# EAGLE board TTGO_shield_revC (EAGLE 9.0.1)
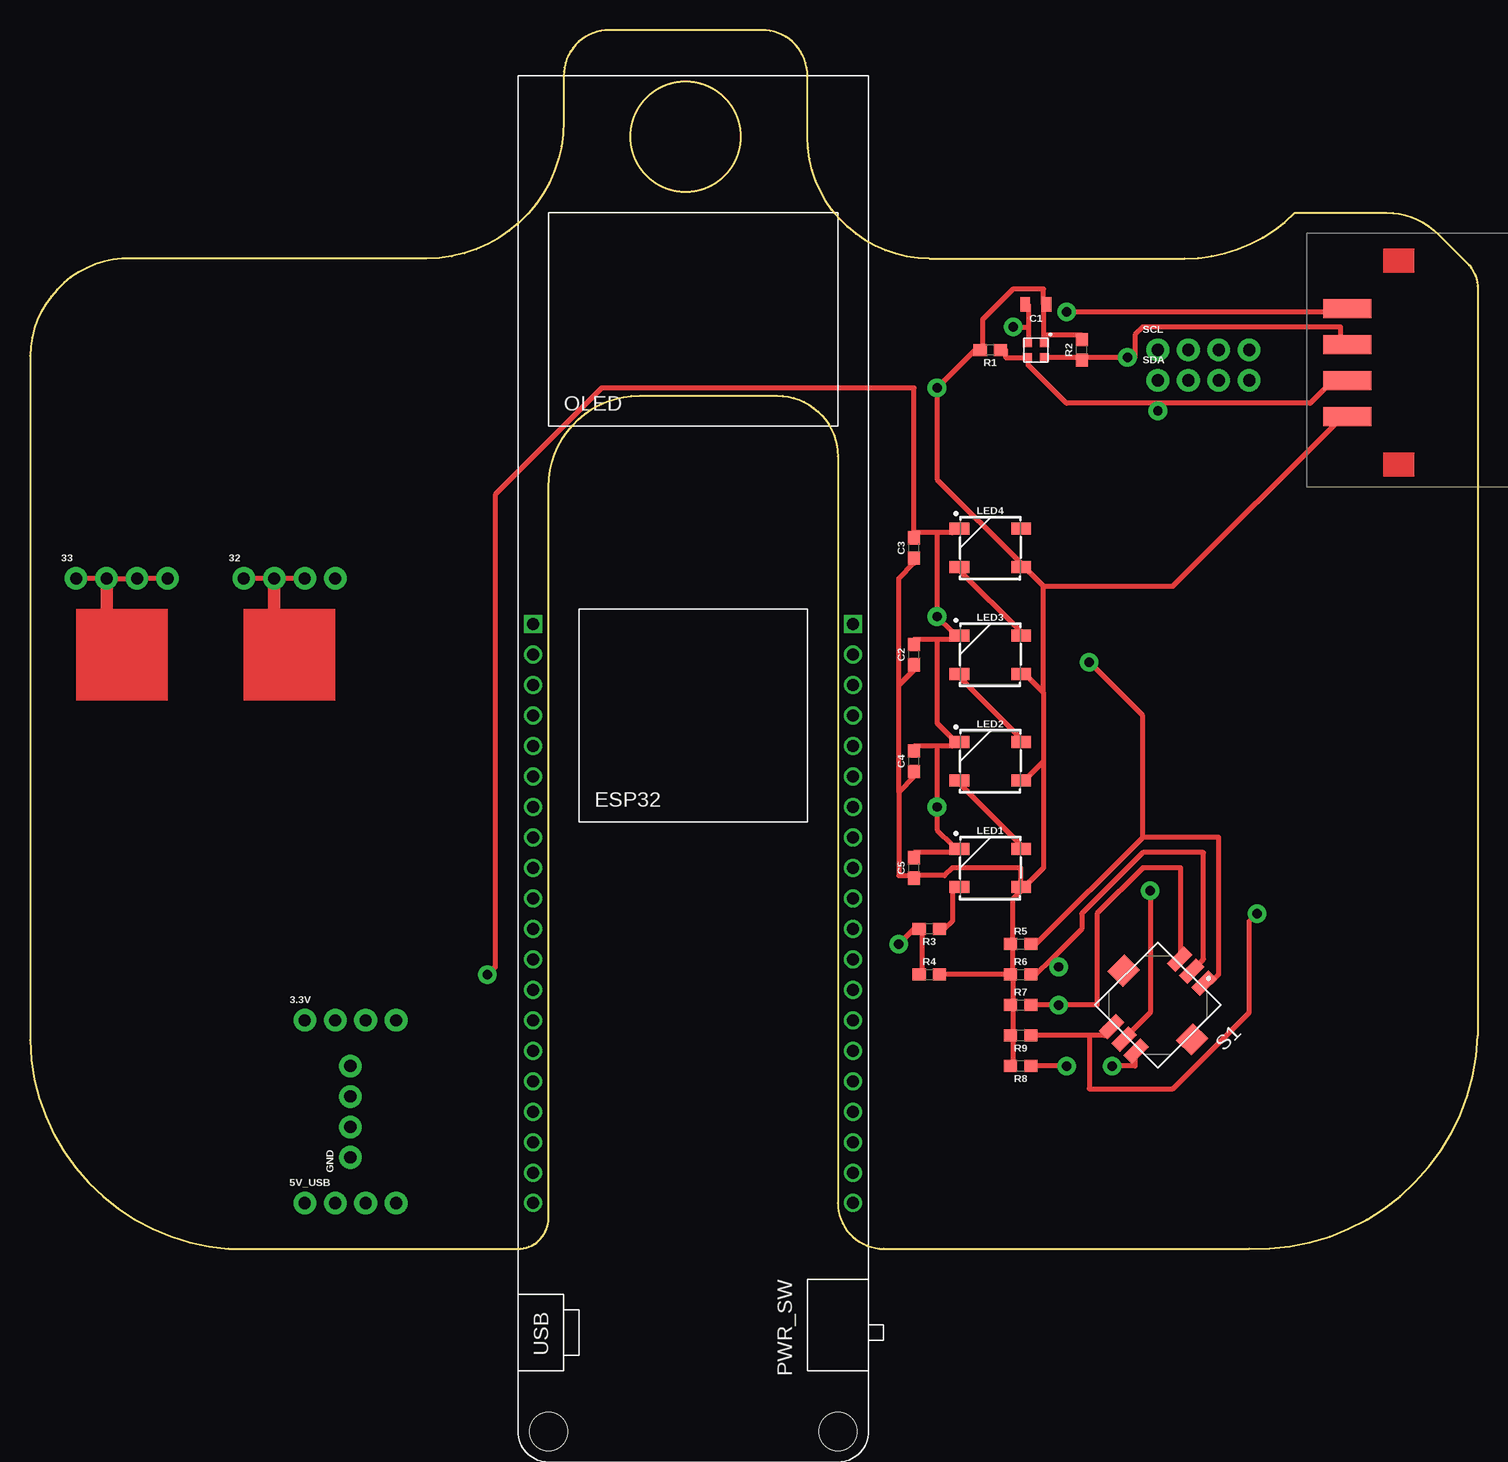
[diagram p0: board, top side]
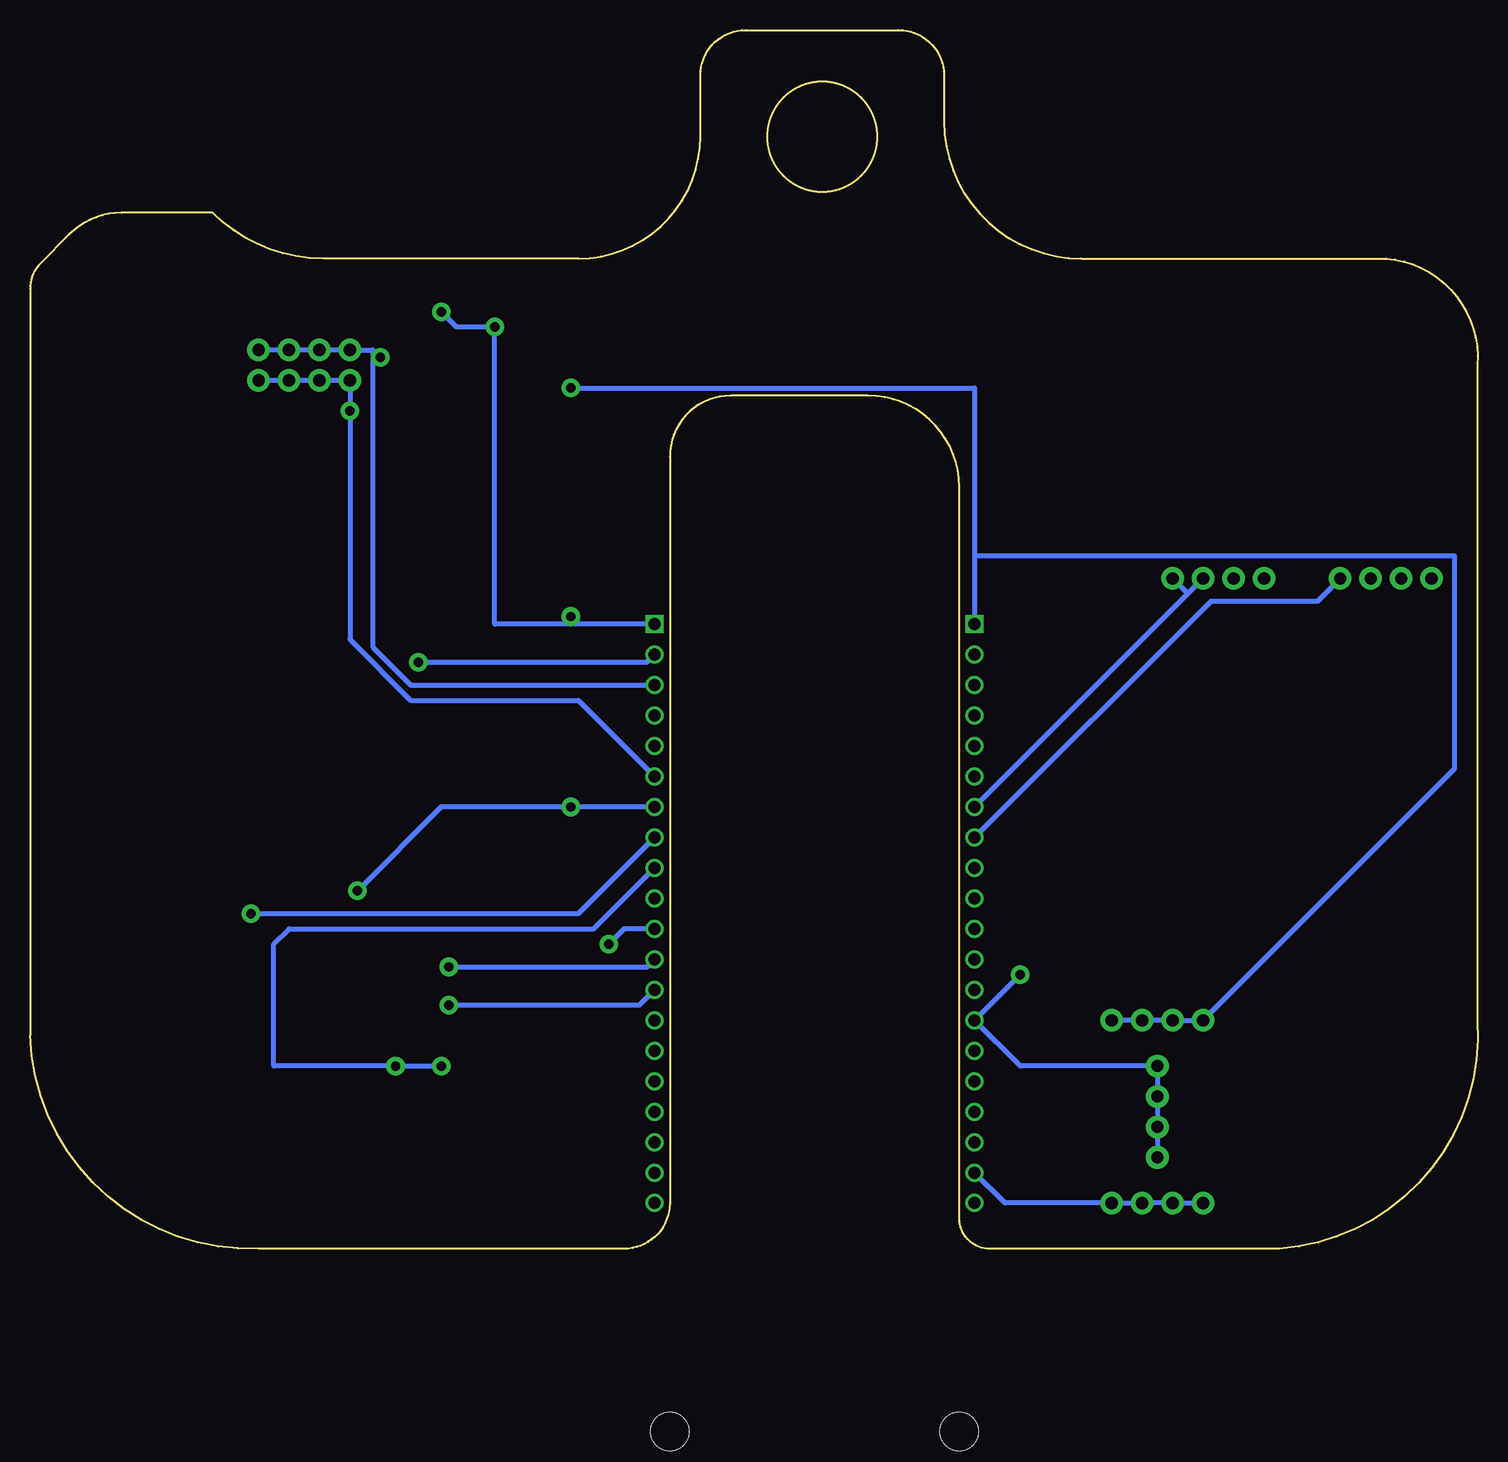
[diagram p1: board, bottom side, seen from below]

Size 120.69 x 101.6 mm. Coordinates in mm from the lower left corner, seen from the top.
Outline: 43.22,2.54 43.22,63.5 arc-90 50.84,71.12 62.27,71.12 arc-90 67.35,66.04 67.35,3.81 arc90 71.16,0 101.64,0 arc90 120.69,17.78 120.69,80.01 arc45 119.79,82.18 117.41,84.56 arc45 113.07,86.36 105.45,86.36 arc-45 96.25,82.55 74.97,82.55 arc-90 64.81,92.71 64.81,97.79 arc90 61,101.6 48.3,101.6 arc90 44.49,97.79 44.49,93.98 arc-90 33.06,82.55 7.66,82.55 arc90 0.04,73.66 0.04,19.05 arc90 16.55,0 40.68,0 arc90 43.22,2.54
Outline: circle at 54.65,92.71 radius 4.58
Copper layers (1*16): Top 0.035mm / dielectric 1.5mm / Bottom 0.035mm
Design rules "OthermillDRC_1_64_v2": minimum track width 16mil, minimum drill 31mil, track to track 0.39878125mm, track to pad 0.39878125mm, pad to pad 0.39878125mm, via to via 0.39878125mm, smd to smd 0mil, copper to edge 0mil, drill to drill 1mil, minimum pad ring 0mil, minimum via ring 15mil, stop-mask expansion 1mil, vias tented up to drill 30mil, thermal gap 10mil
tRestrict: area 39.4,1.3 to 44.5,54.6; area 66.1,1.3 to 71.2,54.6; area 21.6,17.8 to 31.8,20.3; area 25.4,6.4 to 28,16.5; area 21.6,2.5 to 31.8,5.1; area 92.8,71.1 to 102.9,76.2
vRestrict: area 77.5,55.9 to 82.6,61; area 82.6,73.7 to 85.1,76.2; area 77.5,47 to 82.6,52.1; area 77.5,38.1 to 82.6,43.2; area 77.5,29.2 to 82.6,34.3; area 90.2,16.5 to 97.8,24.1; area 106.7,63.5 to 120.7,85.1

## Footprints (pad centres in the part's own frame; a part is rotated, then mirrored left to right if it is on the bottom)
1X04_NO_SILK = drill 1.016 pad 1.88: 1 0,0; 2 2.54,0; 3 5.08,0; 4 7.62,0
0805 = smd 0.8 x 1.2: 1 -0.9,0; 2 0.9,0
0603 = smd 1.1 x 1: 1 -0.85,0; 2 0.85,0
10120045-400LF = smd 1.6 x 4: A 0.8,2; B 3.8,2; C 6.8,2; D 9.8,2
WS2812B = smd 1.651 x 1: 1 2.577,-1.6; 2 2.577,1.6; 3 -2.577,1.6; 4 -2.577,-1.6
CHIPLED-4 = smd 0.7 x 0.75: 1 -0.6,0.7; 2 -0.6,-0.7; 3 0.6,-0.7; 4 0.6,0.7
TTGO-ESP32-OLED-18650 = drill 1: 0 26.67,16.51; 2 26.67,13.97; 4 26.67,19.05; 5 26.67,26.67; 5V 0,3.81; 12 0,19.05; 13 0,13.97; 14 0,21.59; 15 26.67,11.43; 16 26.67,21.59; 17 26.67,24.13; 18 26.67,29.21; 19 26.67,31.75; 21 26.67,36.83; 22 26.67,44.45; 23 26.67,46.99; 25 0,29.21; 26 0,26.67; 27 0,24.13; 32 0,34.29; 33 0,31.75; 34 0,39.37; 35 0,36.83; CLK 26.67,3.81; CMD 0,6.35; EN 0,46.99; GND 0,16.51; GND@GND_2 26.67,34.29; NC 0,1.27; NC@NC_2 26.67,1.27; RX 26.67,39.37; SD0 26.67,6.35; SD1 26.67,8.89; SD2 0,11.43; SD3 0,8.89; SVN 0,41.91; SVP 0,44.45; TX 26.67,41.91 | drill 1 square: 3.3V 0,49.53; GND@GND_3 26.67,49.53 | hole 3.175: 1.27,-17.78; 25.4,-17.78
JS1400BFQ = smd 2 x 1: 1 -4,1.43; 2 -4,0; 3 -4,-1.43; 4 4,1.43; 5 4,0; 6 4,-1.43 | smd 2 x 1.8: P$1 0,4.05; P$2 0,-4.05

## Placement (x,y rotation side)
3.3V  [1X04_NO_SILK]  22.9,19.05 0 top
5V_USB  [1X04_NO_SILK]  22.9,3.81 0 top
32  [1X04_NO_SILK]  17.82,55.88 0 top
33  [1X04_NO_SILK]  3.85,55.88 0 top
C1  1.0uF  [0805]  83.86,78.74 180 top
C2  0.1uF  [0603]  73.7,49.53 90 top
C3  0.1uF  [0603]  73.7,58.42 90 top
C4  0.1uF  [0603]  73.7,40.64 90 top
C5  0.1uF  [0603]  73.7,31.75 90 top
GND  [1X04_NO_SILK]  26.71,7.62 90 top
HEMA1  10120045-400LF  [10120045-400LF]  111.8,68.58 90 top
LED1  WS2812B  [WS2812B]  80.05,31.75 0 top
LED2  WS2812B  [WS2812B]  80.05,40.64 0 top
LED3  WS2812B  [WS2812B]  80.05,49.53 0 top
LED4  WS2812B  [WS2812B]  80.05,58.42 0 top
LTSNS1  LTR-329ALS-01  [CHIPLED-4]  83.86,74.93 270 top
MAIN  TTGO-ESP32-OLED-18650  [TTGO-ESP32-OLED-18650]  41.95,2.54 0 top
R1  4.7k  [0603]  80.05,74.93 180 top
R2  4.7k  [0603]  87.67,74.93 90 top
R3  470  [0603]  74.97,26.67 180 top
R4  10k  [0603]  74.97,22.86 0 top
R5  10k  [0603]  82.59,25.4 0 top
R6  10k  [0603]  82.59,22.86 0 top
R7  10k  [0603]  82.59,20.32 0 top
R8  10k  [0603]  82.59,15.24 180 top
R9  10k  [0603]  82.59,17.78 180 top
S1  JS1400BFQ  [JS1400BFQ]  94.02,20.32 225 top
SCL  [1X04_NO_SILK]  94.02,74.93 0 top
SDA  [1X04_NO_SILK]  94.02,72.39 0 top

## Library data of the parts
3.3V 5V_USB 32 33 GND SCL SDA = SparkFun-Connectors; PROD_ID: CONN-09696
C1 = SparkFun-Capacitors; PROD_ID: CAP-08064
C2-C5 = SparkFun-Capacitors; PROD_ID: CAP-08604
HEMA1 MAIN S1 = BadgeParts
LED1-LED4 = SparkFun-LED; PROD_ID: DIO-12503
LTSNS1 = NickParts
R1 R2 = SparkFun-Resistors; PROD_ID: RES-07857
R3 = SparkFun-Resistors; PROD_ID: RES-07869
R4-R9 = SparkFun-Resistors; PROD_ID: RES-00824

## Nets
5V: 5V_USB.1 5V_USB.2 5V_USB.3 5V_USB.4 MAIN.5V
B1: MAIN.23 R5.2 S1.1
B2: MAIN.16 R6.2 S1.2
B3: MAIN.4 R7.2 S1.3
B4: MAIN.18 R8.1 S1.4
B5: MAIN.19 R9.1 S1.6
CAP1: 32.1 32.2 32.3 32.4 MAIN.32
CAP2: 33.1 33.2 33.3 33.4 MAIN.33
GND: C1.2 C2.2 C3.2 C4.2 C5.2 GND.1 GND.2 GND.3 GND.4 HEMA1.D LED1.3 LED2.3 LED3.3 LED4.3 LTSNS1.2 MAIN.GND MAIN.GND@GND_2 MAIN.GND@GND_3 S1.5
N$9: LED1.2 LED2.4
N$10: LED2.2 LED3.4
N$11: LED3.2 LED4.4
N$12: LED1.4 R3.1
RGBLEDS: MAIN.17 R3.2 R4.1
SCL: HEMA1.C LTSNS1.4 MAIN.22 R2.1 SCL.1 SCL.2 SCL.3 SCL.4
SDA: HEMA1.B LTSNS1.3 MAIN.21 R1.1 SDA.1 SDA.2 SDA.3 SDA.4
VDD: 3.3V.1 3.3V.2 3.3V.3 3.3V.4 C1.1 C2.1 C3.1 C4.1 C5.1 HEMA1.A LED1.1 LED2.1 LED3.1 LED4.1 LTSNS1.1 MAIN.3.3V R1.2 R2.2 R4.2 R5.1 R6.1 R7.1 R8.2 R9.2

## Tracks (layer width: path | path; a pad name or v marks a point on that pad's centre or on a via)
5V
  Bottom 0.406: 5V_USB.1 5V_USB.2 5V_USB.3 5V_USB.4 39.41,3.81 MAIN.5V
B1  (via drill 0.79)
  Top 0.406: 92.75,34.29 83.86,25.4 R5.2 | 92.75,34.29 99.1,34.29 99.1,22.86 98.47,22.22 S1.1 | v88.31,48.89 92.75,44.45 92.75,34.29
  Bottom 0.406: MAIN.23 69.26,48.89 v88.31,48.89
B2  (via drill 0.79)
  Top 0.406: 85.13,24.13 87.67,26.67 87.67,27.94 92.75,33.02 97.83,33.02 97.83,24.13 S1.2 | 85.13,24.13 83.86,22.86 R6.2 | 85.13,24.13 v85.77,23.5
  Bottom 0.406: MAIN.16 69.26,23.5 v85.77,23.5
B3  (via drill 0.79)
  Top 0.406: R7.2 v85.77,20.32 88.94,20.32 88.94,27.94 92.75,31.75 95.93,31.75 95.93,24.76 S1.3
  Bottom 0.406: MAIN.4 69.89,20.32 v85.77,20.32
B4  (via drill 0.79)
  Top 0.406: v86.4,15.24 R8.1 | v90.21,15.24 92.12,15.24 92.12,15.88 S1.4
  Bottom 0.406: v86.4,15.24 v90.21,15.24 100.37,15.24 100.37,25.4 99.1,26.67 73.7,26.67 MAIN.18
B5  (via drill 0.79)
  Top 0.406: 88.31,17.78 89.58,17.78 89.58,18.42 S1.6 | 88.31,17.78 R9.1 | v102.28,27.94 101.64,27.31 101.64,19.68 95.29,13.33 88.31,13.33 88.31,17.78
  Bottom 0.406: MAIN.19 74.97,27.94 v102.28,27.94
CAP1
  Top 0.406: 32.1 32.2 32.3
  Bottom 0.406: 32.3 24.17,54.61 | 24.17,54.61 MAIN.32 | 24.17,54.61 32.4
CAP2
  Top 0.406: 33.1 33.2 33.3 33.4
  Bottom 0.406: MAIN.33 22.27,53.97 13.38,53.97 33.4
GND  (via drill 0.79)
  Top 0.406: 83.23,76.83 83.23,78.74 C1.2 | 83.23,76.83 83.23,75.56 LTSNS1.2 | v81.96,76.83 83.23,76.83 | v86.4,78.1 109.26,78.1 HEMA1.D | C5.2 73.7,33.02 76.88,33.02 LED1.3 76.88,33.66 75.61,34.92 v75.61,36.83 75.61,41.91 | 75.61,41.91 76.88,41.91 LED2.3 76.88,42.55 75.61,43.81 75.61,50.8 | 75.61,41.91 73.7,41.91 C4.2 | 75.61,50.8 76.88,50.8 LED3.3 76.88,51.44 v75.61,52.7 75.61,59.69 | 75.61,50.8 73.7,50.8 C2.2 | 75.61,59.69 76.88,59.69 LED4.3 | 75.61,59.69 73.7,59.69 | S1.5 93.39,19.68 v93.39,29.85 | v38.14,22.86 38.78,23.5 38.78,62.86 47.67,71.75 73.7,71.75 73.7,59.69 | 73.7,59.69 C3.2
  Bottom 0.406: MAIN.GND@GND_3 75.61,52.07 | 75.61,52.07 81.96,52.07 v81.96,76.83 85.13,76.83 v86.4,78.1 | GND.1 GND.2 GND.3 GND.4 38.14,15.24 MAIN.GND v38.14,22.86 | v93.39,29.85 86.4,36.83 v75.61,36.83 MAIN.GND@GND_2 | v75.61,52.7 75.61,52.07
N$9
  Top 0.406: LED2.4 77.51,38.73 82.59,33.66 LED1.2
N$10
  Top 0.406: LED3.4 77.51,47.62 82.59,42.55 LED2.2
N$11
  Top 0.406: LED4.4 77.51,56.52 82.59,51.44 LED3.2
N$12
  Top 0.406: R3.1 76.24,26.67 76.88,27.31 76.88,29.85 LED1.4
RGBLEDS  (via drill 0.79)
  Top 0.406: R4.1 74.34,22.86 74.34,26.67 R3.2 73.7,26.67 v72.43,25.4
  Bottom 0.406: v72.43,25.4 71.16,26.67 MAIN.17
SCL  (via drill 0.79)
  Top 0.406: 87.67,74.3 84.5,74.3 LTSNS1.4 | 87.67,74.3 v91.48,74.3 92.12,74.3 92.12,76.2 92.75,76.83 109.26,76.83 109.26,75.56 HEMA1.C | 87.67,74.3 R2.1
  Bottom 0.406: MAIN.22 88.94,46.99 92.12,50.16 92.12,74.3 | 92.12,74.3 92.12,74.93 SCL.1 SCL.2 SCL.3 SCL.4 | 92.12,74.3 v91.48,74.3
SDA  (via drill 0.79)
  Top 0.406: 83.23,74.3 81.32,74.3 81.32,74.93 R1.1 | 83.23,74.3 83.23,73.66 86.4,70.48 94.02,70.48 | 94.02,70.48 106.72,70.48 107.99,71.75 109.26,71.75 HEMA1.B | 83.23,74.3 LTSNS1.3 | v94.02,69.85 94.02,70.48
  Bottom 0.406: MAIN.21 74.97,45.72 88.94,45.72 94.02,50.8 v94.02,69.85 SDA.1 SDA.2 SDA.3 SDA.4
VDD  (via drill 0.79)
  Top 0.406: 73.7,31.11 72.43,31.11 72.43,38.1 | 72.43,38.1 73.7,39.37 C4.1 | 72.43,46.99 73.7,48.26 C2.1 | 72.43,38.1 72.43,46.99 | 72.43,46.99 72.43,55.88 73.7,57.15 C3.1 | 81.96,17.78 81.96,15.24 R8.2 | R4.2 R6.1 81.96,22.86 | 81.96,22.86 81.96,20.32 | 81.96,22.86 81.96,25.4 | 81.96,25.4 81.96,29.21 82.59,29.85 LED1.1 | 81.96,25.4 R5.1 | 81.96,20.32 81.96,17.78 | 81.96,17.78 R9.2 | 81.96,20.32 R7.1 | 84.5,40.64 83.23,39.37 LED2.1 | 84.5,46.35 84.5,40.64 | 84.5,46.35 83.23,47.62 LED3.1 | 84.5,55.24 83.23,56.52 LED4.1 82.59,57.15 75.61,64.13 v75.61,71.75 78.78,74.93 R1.2 79.42,74.93 79.42,77.47 81.96,80.01 84.5,80.01 84.5,78.74 | 84.5,46.35 84.5,55.24 | 84.5,55.24 95.29,55.24 109.26,69.22 HEMA1.A | 84.5,40.64 84.5,31.75 83.23,30.48 LED1.1 | 73.7,31.11 76.24,31.11 76.88,31.75 82.59,31.75 82.59,30.48 LED1.1 | 73.7,31.11 C5.1 | 84.5,78.74 84.5,76.2 | 84.5,76.2 84.5,75.56 LTSNS1.1 | 84.5,78.74 C1.1 | 84.5,76.2 87.67,76.2 R2.2
  Bottom 0.406: 3.3V.4 3.3V.3 3.3V.2 3.3V.1 1.95,40 1.95,57.78 41.95,57.78 | 41.95,57.78 41.95,71.75 v75.61,71.75 | 41.95,57.78 MAIN.3.3V
(copper drawn outside any net)
  shapes: Top area x4